# EAGLE board LTC_Balancer6 (EAGLE 5.06)
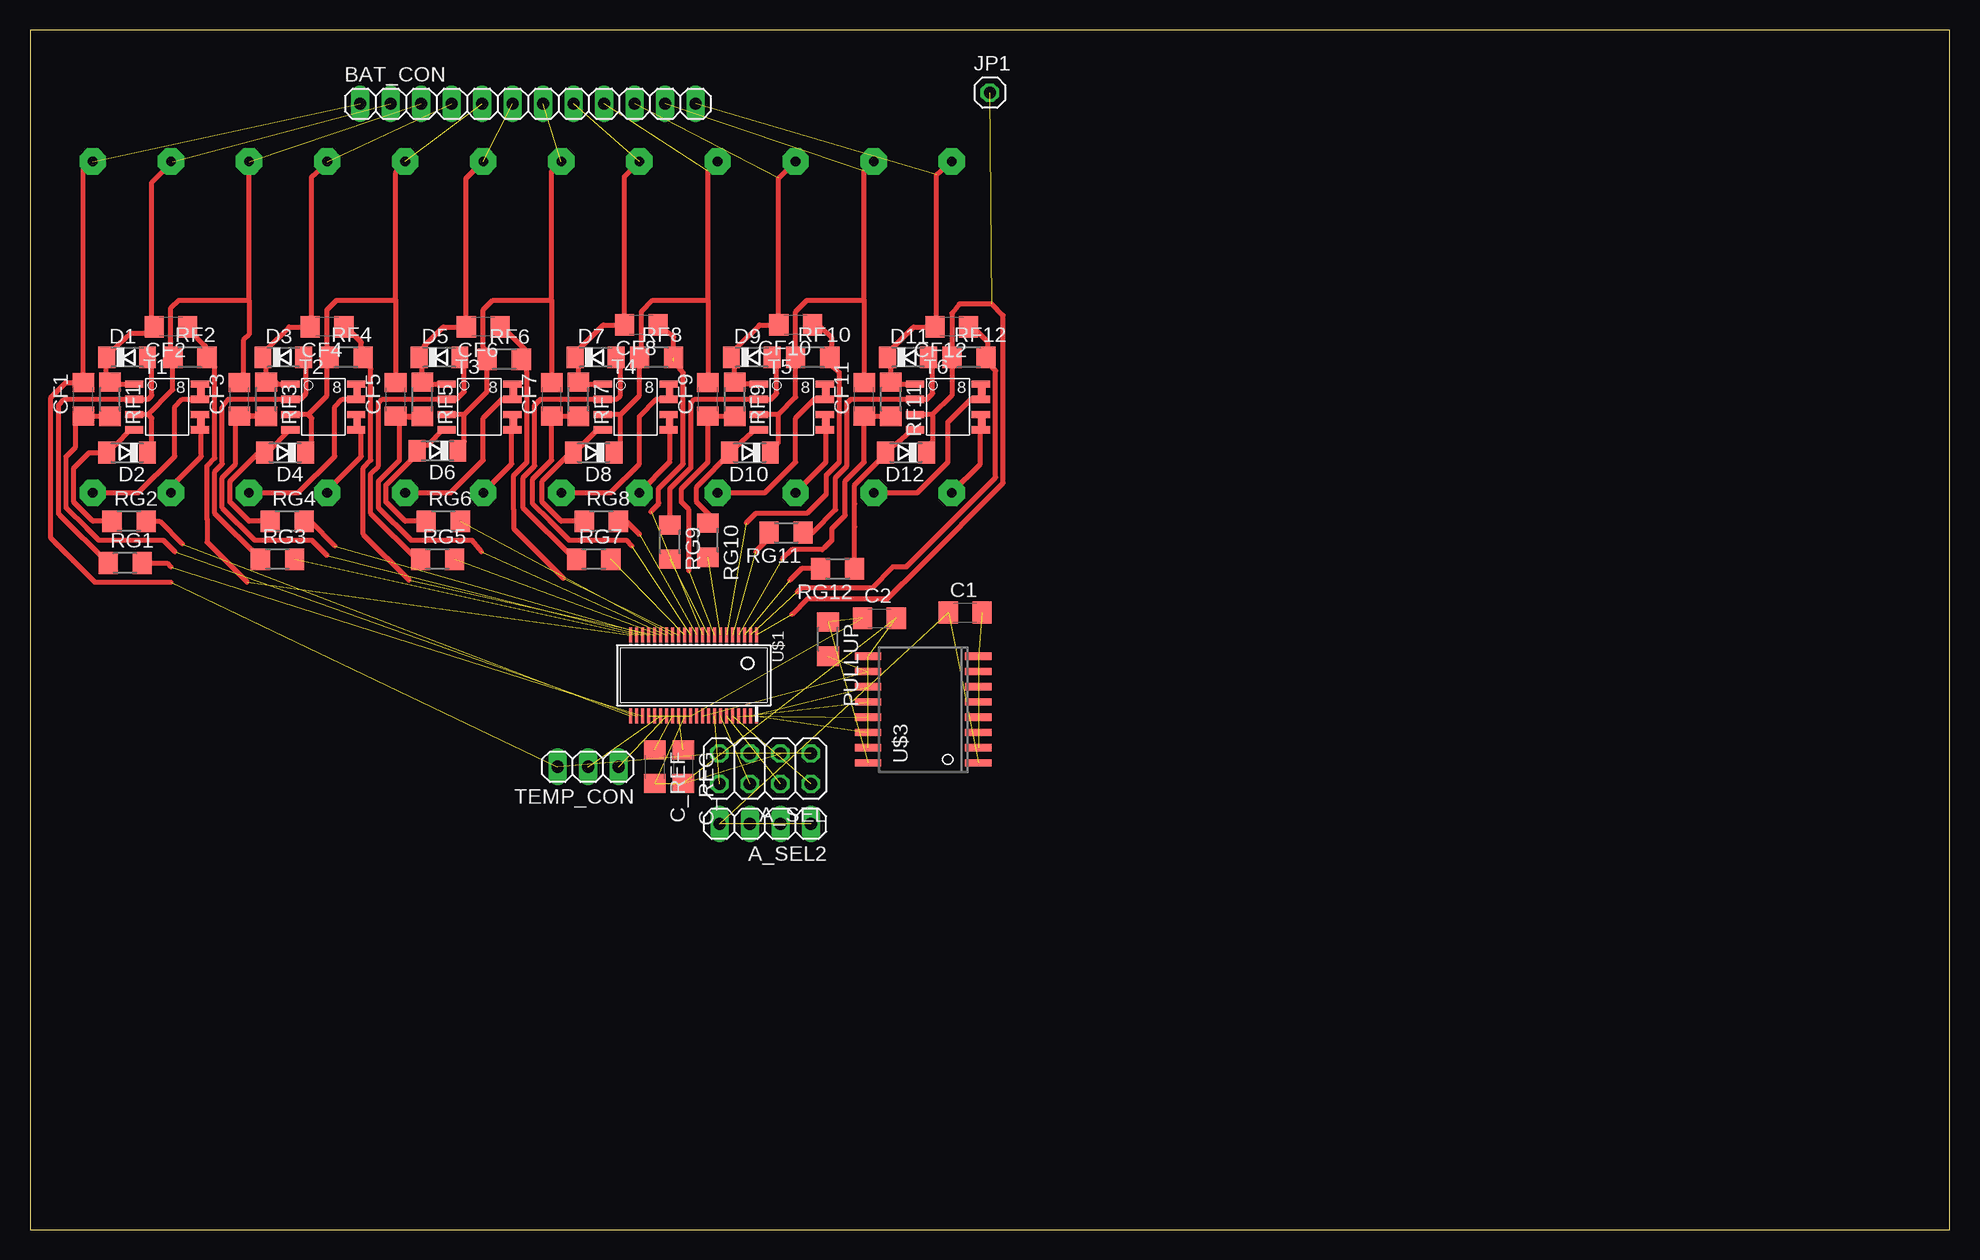
[diagram p0: board, top side]
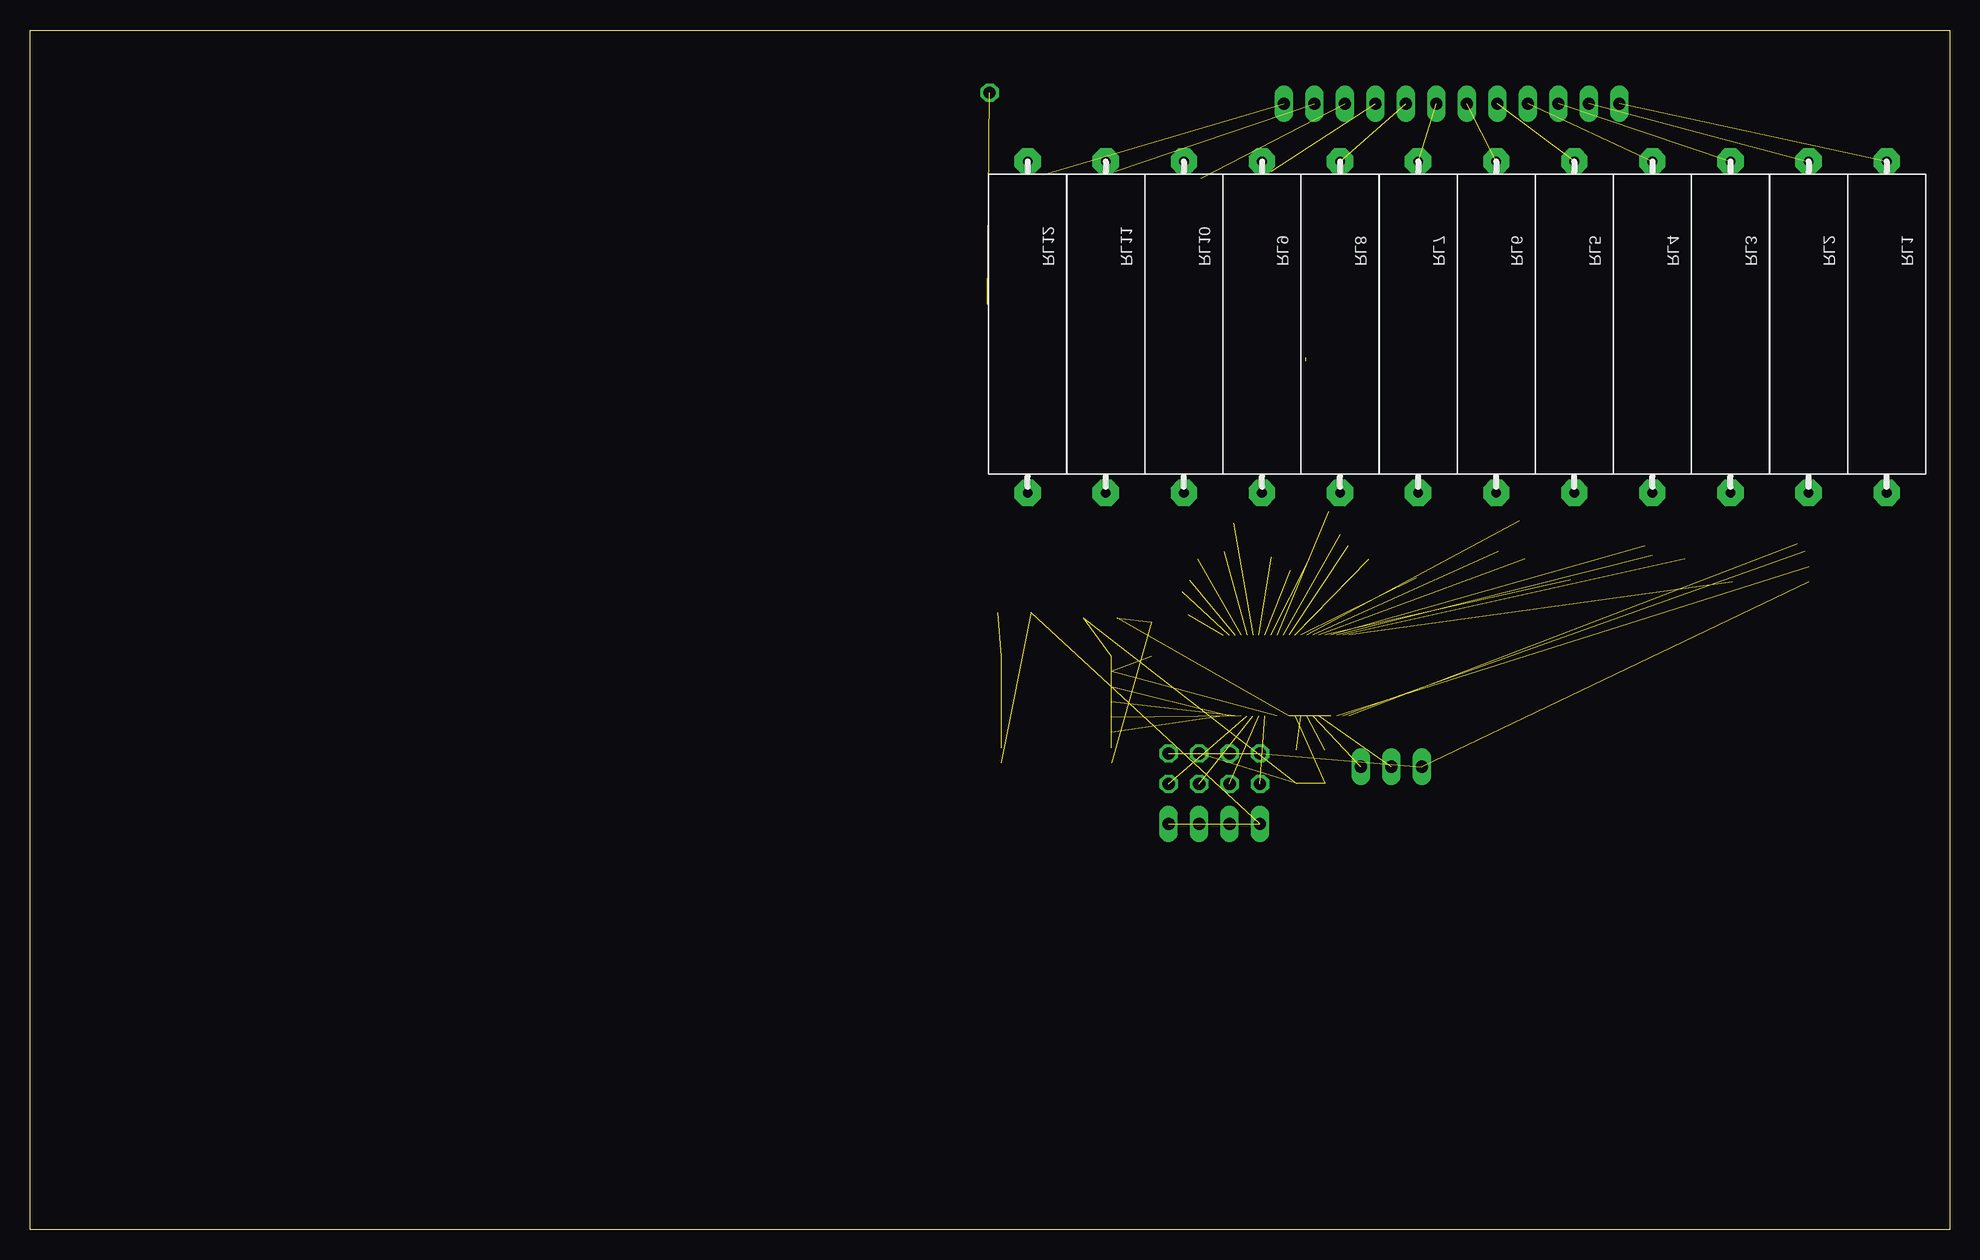
[diagram p1: board, bottom side, seen from below]

Size 160 x 100 mm. Coordinates in mm from the lower left corner, seen from the top.
Outline: 0,0 160,0 160,100 0,100 0,0
Copper layers (1*16): Top 0.035mm / dielectric 1.5mm / Bottom 0.035mm
Design rules "default": minimum track width 10mil, minimum drill 24mil, track to track 8mil, track to pad 8mil, pad to pad 8mil, via to via 8mil, smd to smd 8mil, copper to edge 40mil, drill to drill 8mil, minimum pad ring 10mil, minimum via ring 8mil, stop-mask expansion 4mil, vias tented up to drill 0mil, thermal gap 10mil

## Footprints (pad centres in the part's own frame; a part is rotated, then mirrored left to right if it is on the bottom)
2X04 = drill 1.016 octagon: 1 -3.81,-1.27; 2 -3.81,1.27; 3 -1.27,-1.27; 4 -1.27,1.27; 5 1.27,-1.27; 6 1.27,1.27; 7 3.81,-1.27; 8 3.81,1.27
1X04 = drill 1.016 long: 1 -3.81,0; 2 -1.27,0; 3 1.27,0; 4 3.81,0
1X12 = drill 1.016 long: 1 -13.97,0; 2 -11.43,0; 3 -8.89,0; 4 -6.35,0; 5 -3.81,0; 6 -1.27,0; 7 1.27,0; 8 3.81,0; 9 6.35,0; 10 8.89,0; 11 11.43,0; 12 13.97,0
C1206 = smd 1.6 x 1.8: 1 -1.4,0; 2 1.4,0
SOD80C = smd 1.4 x 1.8: A 1.7,0; C -1.7,0
1X01 = drill 1.016 octagon: 1 0,0
R1206 = smd 1.6 x 1.803: 1 -1.422,0; 2 1.422,0
R_5W = drill 0.813 pad 2.184 octagon: 1 0.46,0; 2 28.08,0
SO8 = smd 1.524 x 0.61: 1 1.067,4.445; 2 1.067,3.175; 3 1.067,1.905; 4 1.067,0.635; 5 6.553,0.635; 6 6.553,1.905; 7 6.553,3.175; 8 6.553,4.445 | smd 0.61 x 1.524: 9 6.635,3.703; 10 6.635,1.203
1X03 = drill 1.016 long: 1 -2.54,0; 2 0,0; 3 2.54,0
SSOP44DL = smd 0.25 x 1.25: 1 1.1,0.435; 2 1.6,0.435; 3 2.1,0.435; 4 2.6,0.435; 5 3.1,0.435; 6 3.6,0.435; 7 4.1,0.435; 8 4.6,0.435; 9 5.1,0.435; 10 5.6,0.435; 11 6.1,0.435; 12 6.6,0.435; 13 7.1,0.435; 14 7.6,0.435; 15 8.1,0.435; 16 8.6,0.435; 17 9.1,0.435; 18 9.6,0.435; 19 10.1,0.435; 20 10.6,0.435; 21 11.1,0.435; 22 11.6,0.435; 23 11.6,7.185; 24 11.1,7.185; 25 10.6,7.185; 26 10.1,7.185; 27 9.6,7.185; 28 9.1,7.185; 29 8.6,7.185; 30 8.1,7.185; 31 7.6,7.185; 32 7.1,7.185; 33 6.6,7.185; 34 6.1,7.185; 35 5.6,7.185; 36 5.1,7.185; 37 4.6,7.185; 38 4.1,7.185; 39 3.6,7.185; 40 3.1,7.185; 41 2.6,7.185; 42 2.1,7.185; 43 1.6,7.185; 44 1.1,7.185
SO16 = smd 0.6 x 2.2: 1 1.905,1.75; 2 3.175,1.75; 3 4.445,1.75; 4 5.715,1.75; 5 6.985,1.75; 6 8.255,1.75; 7 9.525,1.75; 8 10.795,1.75; 9 10.795,10.95; 10 9.525,10.95; 11 8.255,10.95; 12 6.985,10.95; 13 5.715,10.95; 14 4.445,10.95; 15 3.175,10.95; 16 1.905,10.95

## Placement (x,y rotation side)
A_SEL  [2X04]  61.28,38.42 180 top
A_SEL2  [1X04]  61.28,33.81 180 top
BAT_CON  [1X12]  41.5,93.85 0 top
C1  100n  [C1206]  77.95,51.44 0 top
C2  100n  [C1206]  70.8,50.96 0 top
C_REF  1u  [C1206]  52.07,38.58 270 top
C_REG  1u  [C1206]  54.45,38.58 270 top
CF1  100n  [C1206]  4.45,69.22 90 top
CF2  100n  [C1206]  11.75,75.25 180 top
CF3  100n  [C1206]  17.46,69.22 90 top
CF4  100n  [C1206]  24.77,75.25 180 top
CF5  100n  [C1206]  30.48,69.22 90 top
CF6  100n  [C1206]  37.78,75.25 180 top
CF7  100n  [C1206]  43.5,69.22 90 top
CF8  100n  [C1206]  50.96,75.41 180 top
CF9  100n  [C1206]  56.51,69.22 90 top
CF10  100n  [C1206]  63.82,75.41 180 top
CF11  100n  [C1206]  69.53,69.22 90 top
CF12  100n  [C1206]  76.83,75.25 180 top
D1  [SOD80C]  8.1,72.71 0 top
D2  [SOD80C]  8.1,64.77 180 top
D3  [SOD80C]  21.11,72.71 0 top
D4  [SOD80C]  21.27,64.77 180 top
D5  [SOD80C]  34.13,72.71 0 top
D6  [SOD80C]  33.97,64.93 180 top
D7  [SOD80C]  47.15,72.71 0 top
D8  [SOD80C]  46.99,64.77 180 top
D9  [SOD80C]  60.17,72.71 0 top
D10  [SOD80C]  60.01,64.77 180 top
D11  [SOD80C]  73.18,72.71 0 top
D12  [SOD80C]  73.02,64.77 180 top
JP1  [1X01]  80.01,94.77 0 top
PULLUP  10k  [R1206]  66.52,49.21 270 top
RF1  100  [R1206]  6.67,69.22 270 top
RF2  100  [R1206]  13.33,72.71 0 top
RF3  100  [R1206]  19.68,69.22 270 top
RF4  100  [R1206]  26.35,72.71 0 top
RF5  100  [R1206]  32.7,69.22 270 top
RF6  100  [R1206]  39.53,72.55 0 top
RF7  100  [R1206]  45.72,69.22 270 top
RF8  100  [R1206]  52.23,72.71 0 top
RF9  100  [R1206]  58.74,69.22 270 top
RF10  100  [R1206]  65.25,72.71 0 top
RF11  100  [R1206]  71.75,69.22 270 top
RF12  100  [R1206]  78.26,72.71 0 top
RG1  3k3  [R1206]  7.94,55.56 0 top
RG2  3k3  [R1206]  8.26,59.05 0 top
RG3  3k3  [R1206]  20.64,55.88 0 top
RG4  3k3  [R1206]  21.43,59.05 0 top
RG5  3k3  [R1206]  33.97,55.88 0 top
RG6  3k3  [R1206]  34.45,59.05 0 top
RG7  3k3  [R1206]  46.99,55.88 0 top
RG8  3k3  [R1206]  47.62,59.05 0 top
RG9  3k3  [R1206]  53.34,57.31 270 top
RG10  3k3  [R1206]  56.51,57.47 270 top
RG11  3k3  [R1206]  63.02,58.1 180 top
RG12  3k3  [R1206]  67.31,55.09 180 top
RL1  R_5W  [R_5W]  5.24,60.96 90 top
RL2  R_5W  [R_5W]  11.75,60.96 90 top
RL3  R_5W  [R_5W]  18.26,60.96 90 top
RL4  R_5W  [R_5W]  24.77,60.96 90 top
RL5  R_5W  [R_5W]  31.27,60.96 90 top
RL6  R_5W  [R_5W]  37.78,60.96 90 top
RL7  R_5W  [R_5W]  44.29,60.96 90 top
RL8  R_5W  [R_5W]  50.8,60.96 90 top
RL9  R_5W  [R_5W]  57.31,60.96 90 top
RL10  R_5W  [R_5W]  63.82,60.96 90 top
RL11  R_5W  [R_5W]  70.33,60.96 90 top
RL12  R_5W  [R_5W]  76.83,60.96 90 top
T1  IRF_7104  [SO8]  7.62,66.04 0 top
T2  IRF_7104  [SO8]  20.64,66.04 0 top
T3  IRF_7104  [SO8]  33.66,66.04 0 top
T4  IRF_7104  [SO8]  46.67,66.04 0 top
T5  IRF_7104  [SO8]  59.69,66.04 0 top
T6  IRF_7104  [SO8]  72.71,66.04 0 top
TEMP_CON  [1X03]  46.51,38.58 180 top
U$1  LTC6802-2  [SSOP44DL]  61.67,50.02 180 top
U$3  ADUM1401  [SO16]  80.8,36.99 90 top

## Library data of the parts
A_SEL A_SEL2 BAT_CON JP1 TEMP_CON = pinhead
C1 C2 C_REF C_REG CF1-CF12 PULLUP RF1-RF12 RG1-RG12 = rcl
D1-D12 = diode
RL1-RL12 = R_Power
T1-T6 = IRF_7104
U$1 = LTC6802
U$3 = ADuM1401

## Nets
+5V: C2.1 C_REG.1 PULLUP.1 U$1.31 U$1.33 U$3.16
A0: A_SEL.8 U$1.37
A1: A_SEL.6 U$1.38
A2: A_SEL.4 U$1.39
A3: A_SEL.2 U$1.40
ASD: RL5.1 T3.7
BK2: BAT_CON.2 CF2.2 D1.C RF1.1 RL2.2 T1.1
BK3: BAT_CON.3 CF3.2 D2.C RF2.1 RL3.2 T1.3
BK4: BAT_CON.4 CF4.2 D3.C RF3.1 RL4.2 T2.1
BK5: BAT_CON.5 CF5.2 D4.C RF4.1 RL5.2 T2.3
BK6: BAT_CON.6 CF6.2 D5.C RF5.1 RL6.2 T3.1
BK7: BAT_CON.7 CF7.2 D6.C RF6.1 RL7.2 T3.3
BK8: BAT_CON.8 CF8.2 D7.C RF7.1 RL8.2 T4.1
BK9: BAT_CON.9 CF9.2 D8.C RF8.1 RL9.2 T4.3
BK10: BAT_CON.10 CF10.2 D9.C RF9.1 RL10.2 T5.1
BK11: BAT_CON.11 CF11.2 D10.C RF10.1 RL11.2 T5.3
BK12: BAT_CON.12 CF12.2 D11.C RF11.1 RL12.2 T6.1
C1: CF1.1 RF1.2 U$1.24
C2: CF2.1 RF2.2 U$1.22
C3: CF3.1 RF3.2 U$1.20
C4: CF4.1 RF4.2 U$1.18
C5: CF5.1 RF5.2 U$1.16
C6: CF6.1 RF6.2 U$1.14
C7: CF7.1 RF7.2 U$1.12
C8: CF8.1 RF8.2 U$1.10
C9: CF9.1 RF9.2 U$1.8
C10: CF10.1 RF10.2 U$1.6
C11: CF11.1 RF11.2 U$1.4
C12: CF12.1 RF12.2 U$1.2
CS: U$3.3
CSBI: U$1.44 U$3.14
GND: C1.2 U$3.2 U$3.8
GPIO1: PULLUP.2 U$1.35 U$3.10
ISO_EN: U$3.7
MISO: U$3.6
MOSI: U$3.5
N$2: TEMP_CON.1 U$1.29
N$3: C_REF.1 U$1.30
N$4: TEMP_CON.2 U$1.28
N$5: RL3.1 T2.7
N$6: RL4.1 T2.5
N$8: RL1.1 T1.7
N$9: RL2.1 T1.5
N$10: RL6.1 T3.5
N$11: RL7.1 T4.7
N$12: RL8.1 T4.5
N$13: RL9.1 T5.7
N$14: RL10.1 T5.5
N$15: RL11.1 T6.7
N$16: RL12.1 T6.5
N$17: D1.A RG1.1 T1.2
N$23: D2.A RG2.1 T1.4
N$55: D3.A RG3.1 T2.2
N$56: D4.A RG4.1 T2.4
N$57: D5.A RG5.1 T3.2
N$58: D7.A RG7.1 T4.2
N$59: D6.A RG6.1 T3.4
N$60: D8.A RG8.1 T4.4
N$61: D9.A RG9.1 T5.2
N$62: D10.A RG10.1 T5.4
N$63: D11.A RG11.1 T6.2
N$64: D12.A RG12.1 T6.4
S1: RG1.2 U$1.25
S2: RG2.2 U$1.23
S3: RG3.2 U$1.21
S4: RG4.2 U$1.19
S5: RG5.2 U$1.17
S6: RG6.2 U$1.15
S7: RG7.2 U$1.13
S8: RG8.2 U$1.11
S9: RG9.2 U$1.9
S10: RG10.2 U$1.7
S11: RG11.2 U$1.5
S12: RG12.2 U$1.3
SCK: U$3.4
SCKI: U$1.41 U$3.13
SDI: U$1.42 U$3.12
SDO: U$1.43 U$3.11
V+: D12.C JP1.1 RF12.1 T6.3 U$1.1
V-: A_SEL.1 A_SEL.3 A_SEL.5 A_SEL.7 BAT_CON.1 C2.2 C_REF.2 C_REG.2 CF1.2 RL1.2 TEMP_CON.3 U$1.26 U$1.27 U$1.32 U$3.9 U$3.15
VCC: A_SEL2.1 A_SEL2.2 A_SEL2.3 A_SEL2.4 C1.1 U$3.1

## Tracks (layer width: path | path; a pad name or v marks a point on that pad's centre or on a via)
+5V  (5 unrouted)
A0  (1 unrouted)
A1  (1 unrouted)
A2  (1 unrouted)
A3  (1 unrouted)
ASD
  Top 0.406: RL5.1 35.07,61.42 37.78,64.14 37.78,67.63 39.37,69.22 T3.7
BK2  (1 unrouted)
  Top 0.406: RL2.2 11.89,89.04 10.16,87.31 10.16,74.74 | T1.1 6.5,70.48 RF1.1 6.52,70.64 6.35,70.8 6.35,72.59 D1.C 6.24,72.72 7.94,74.3 8.38,74.74 10.16,74.74 | 10.16,74.74 CF2.2
BK3  (1 unrouted)
  Top 0.406: 9.84,67.94 11.91,70.02 RF2.1 11.6,73.19 11.75,73.34 11.75,76.83 12.38,77.47 18.26,77.47 | 9.84,67.94 T1.3 | 9.84,67.94 10.16,67.63 10.16,65.29 D2.C | 18.26,77.47 18.26,74.61 17.78,74.14 17.78,70.96 17.46,70.64 CF3.2 | 18.26,77.47 RL3.2
BK4  (1 unrouted)
  Top 0.406: RL4.2 24.77,88.9 23.5,87.79 23.5,75.44 CF4.2 21.59,75.25 19.68,73.34 19.68,72.82 D3.C 19.57,72.19 19.68,71.75 RF3.1 20.48,70.64 20.64,70.48 T2.1
BK5  (1 unrouted)
  Top 0.406: 23.18,67.94 T2.3 | 23.18,67.94 23.5,67.63 23.5,64.97 D4.C | 23.18,67.94 24.77,69.53 24.77,72.54 RF4.1 24.93,73.19 24.77,73.34 | 24.77,73.34 25.08,73.03 | 24.77,73.34 24.77,76.68 25.56,77.47 30.48,77.47 | RL5.2 31.27,89.06 30.48,88.11 30.48,77.47 | 30.48,77.47 30.48,73.66 CF5.2
BK6  (1 unrouted)
  Top 0.406: RL6.2 37.78,89.06 36.35,87.63 36.35,75.54 CF6.2 34.45,75.25 32.86,73.66 32.86,72.98 D5.C 32.75,72.34 32.7,71.91 RF5.1 33.33,70.48 33.97,70.48 T3.1
BK7  (1 unrouted)
  Top 0.406: D6.C 35.99,65.52 36.2,65.72 36.2,67.94 | 36.2,67.94 T3.3 | 36.2,67.94 38.11,69.86 RF6.1 38.27,73.19 37.78,73.5 37.78,76.68 38.58,77.47 43.5,77.47 | RL7.2 44.13,88.9 43.5,88.27 43.5,77.47 | 43.5,77.47 CF7.2
BK8  (1 unrouted)
  Top 0.406: T4.1 47.31,70.48 46.36,70.48 RF7.1 45.72,72.23 45.61,72.19 D7.C 45.88,72.98 45.88,73.5 47.78,75.41 CF8.2 49.56,87.8 RL8.2
BK9  (1 unrouted)
  Top 0.406: 49.21,67.94 50.81,69.54 RF8.1 50.81,73.19 50.96,73.34 50.96,76.52 51.91,77.47 56.52,77.47 | 49.21,67.94 T4.3 | 49.21,67.94 49.21,65.45 D8.C | 56.52,77.47 56.52,70.77 CF9.2 | 56.52,77.47 56.52,88.25 RL9.2
BK10  (1 unrouted)
  Top 0.406: RL10.2 63.8,89.04 62.39,87.63 62.39,75.38 CF10.2 60.8,75.41 58.9,73.5 58.58,73.3 D9.C 58.94,72.82 58.74,72.23 RF9.1 59.38,70.48 60.64,70.48 T5.1
BK11  (1 unrouted)
  Top 0.406: 62.39,67.94 63.82,69.38 RF10.1 63.67,72.87 63.82,73.03 63.82,76.52 64.77,77.47 69.53,77.47 | 62.39,67.94 T5.3 | D10.C 61.87,65.36 62.39,65.56 62.39,67.94 | 69.53,77.47 CF11.2 | 69.53,77.47 69.53,88.25 RL11.2
BK12  (1 unrouted)
  Top 0.406: T6.1 72.22,70.48 RF11.1 71.75,72.12 D11.C 71.64,73.23 73.66,75.25 CF12.2 75.56,75.22 75.56,87.95 76.82,89.04 RL12.2
C1  (1 unrouted)
  Top 0.406: RF1.2 6.33,67.81 CF1.1 3.81,67.63 3.81,65.25 3.02,64.45 3.02,60.17 4.76,58.42 5.71,57.47 11.11,57.47 12.06,56.52
C2  (1 unrouted)
  Top 0.406: RF2.2 14.29,72.22 | RF2.2 14.61,72.71 15.4,71.91 15.4,64.29 14.76,63.66 14.76,59.21 14.76,57.31 18.1,53.98 | CF2.1 13.34,74.93 14.61,73.66 14.61,72.87 RF2.2
C3  (1 unrouted)
  Top 0.406: CF3.1 19.98,67.81 RF3.2 17.63,67.79 17.14,67.31 17.14,63.82 16.03,62.71 16.03,60.17 18.73,57.47 23.5,57.47 24.77,56.2
C4  (1 unrouted)
  Top 0.406: CF4.1 26.48,75.12 27.62,73.98 27.62,72.86 RF4.2 27.77,72.56 28.42,71.75 28.42,64.14 27.78,63.5 27.78,57.94 31.59,54.13
C5  (1 unrouted)
  Top 0.406: CF5.1 33.32,67.5 RF5.2 30.96,67.79 30.8,67.63 30.8,64.14 29.05,62.39 29.05,60.17 31.75,57.47 | 31.75,57.47 | 31.75,57.47 36.83,57.47 37.62,56.52
C6  (1 unrouted)
  Top 0.406: CF6.1 39.82,74.8 41.27,73.34 41.27,72.87 RF6.2 41.11,72.56 41.43,71.44 41.43,63.98 40.32,62.87 40.32,60.01 40.32,58.42 44.45,54.29
C7  (1 unrouted)
  Top 0.406: RF7.2 44.47,67.79 CF7.1 43.5,64.14 41.91,62.55 41.91,60.48 43.34,59.05 44.93,57.47 49.69,57.47 50.16,56.99
C8  (2 unrouted)
  Top 0.406: RF8.2 53.65,74.43 CF8.1 52.04,75.91 52.07,75.88 | 53.66,73.18 53.66,72.39 54.45,71.44 54.45,63.82 52.39,61.75 52.39,60.64 52.39,60.48 51.75,59.85
C9  (1 unrouted)
  Top 0.406: RF9.2 57.81,67.79 CF9.1 56.52,63.98 54.29,61.75 54.29,60.64 54.93,60.01 54.93,54.93
C10  (1 unrouted)
  Top 0.406: CF10.1 65.85,75.28 66.83,74.3 66.83,73.02 RF10.2 66.67,72.08 67.47,71.44 67.47,63.98 66.36,62.87 | 66.36,62.87 | 66.36,62.87 66.36,61.28 64.77,59.69 60.48,59.69 59.69,58.9
C11  (1 unrouted)
  Top 0.406: RF11.2 72.37,67.81 CF11.1 69.53,63.98 67.94,62.39 67.94,59.53 66.83,58.42 66.83,57.47 66.2,56.83 | 66.2,56.83 | 66.2,56.83 66.04,56.67 63.5,56.67 62.71,55.88
C12  (1 unrouted)
  Top 0.406: CF12.1 78.71,75.12 79.85,73.98 79.85,73.02 RF12.2 80.16,71.92 80.49,71.6 80.49,62.71 73.03,55.24 71.91,55.24 70.17,53.5 64.29,53.5 63.98,53.18
CSBI  (1 unrouted)
GND  (2 unrouted)
GPIO1  (2 unrouted)
N$2  (1 unrouted)
N$3  (1 unrouted)
N$4  (1 unrouted)
N$5
  Top 0.406: T2.7 26.04,69.22 25.4,68.58 25.4,64.45 22.37,61.42 RL3.1
N$6
  Top 0.406: RL4.1 25.08,61.91 27.62,64.45 27.62,66.56 T2.5
N$8
  Top 0.406: RL1.1 9.03,61.42 12.06,64.45 12.06,68.58 12.7,69.22 T1.7
N$9
  Top 0.406: RL2.1 11.75,61.91 14.29,64.45 14.29,66.56 T1.5
N$10
  Top 0.406: RL6.1 37.78,61.44 40.16,63.82 40.16,66.56 T3.5
N$11
  Top 0.406: RL7.1 48.4,61.42 50.8,63.82 50.8,67.79 52.23,69.22 T4.7
N$12
  Top 0.406: RL8.1 53.32,63.96 53.34,64.29 53.34,66.47 T4.5
N$13
  Top 0.406: RL9.1 61.26,61.42 63.82,63.98 63.82,67.63 65.41,69.22 T5.7
N$14
  Top 0.406: RL10.1 66.34,63.96 66.36,66.83 66.36,66.79 T5.5
N$15
  Top 0.406: RL11.1 73.96,61.42 76.52,63.98 76.52,67.31 78.42,69.22 T6.7
N$16
  Top 0.406: RL12.1 79.22,63.82 79.22,66.63 T6.5
N$17
  Top 0.406: RG1.1 2.54,59.53 2.38,59.68 2.38,68.74 2.86,69.22 T1.2 9.84,69.22 10.16,69.53 10.16,71.91 9.8,72.59 D1.A
N$23
  Top 0.406: T1.4 8.41,66.67 7.14,65.41 6.87,65.41 D2.A 4.92,64.77 3.65,63.5 3.65,60.64 5.24,59.05 RG2.1
N$55
  Top 0.406: D3.A 22.86,72.59 22.7,72.23 23.02,72.07 23.02,69.69 22.54,69.22 T2.2 16.51,69.22 16.03,68.58 16.03,63.82 15.4,63.18 15.4,59.69 RG3.1
N$56
  Top 0.406: T2.4 19.8,64.77 D4.A 19.05,64.77 16.67,62.39 16.67,60.64 18.26,59.05 RG4.1
N$57
  Top 0.406: D5.A 35.83,72.75 36.2,71.91 36.2,69.85 35.56,69.22 T3.2 29.37,69.22 29.05,68.9 29.05,63.66 28.42,63.02 28.42,59.69 32.38,55.72 RG5.1
N$58
  Top 0.406: D7.A 49.17,72.44 49.21,72.07 49.21,69.53 48.9,69.22 T4.2 42.55,69.22 42.07,68.74 42.07,63.66 41.12,62.71 41.12,60.17 45.25,56.03 RG7.1
N$59
  Top 0.406: 35.24,66.67 T3.4 34.45,66.67 33.18,65.41 32.82,65.41 D6.A 32.38,64.77 29.69,62.07 29.69,60.64 31.27,59.05 RG6.1
N$60
  Top 0.406: T4.4 47.31,66.67 45.72,65.09 45.61,65.09 D8.A 45.24,64.93 42.7,62.39 42.7,60.64 44.29,59.05 RG8.1
N$61
  Top 0.406: D9.A 62.34,72.44 62.23,71.91 62.23,69.69 61.75,69.22 T5.2 55.4,69.22 55.09,68.9 55.09,63.5 53.34,61.75 53.34,58.89 RG9.1
N$62
  Top 0.406: T5.4 60.21,66.52 D10.A 58.58,64.93 55.56,61.91 55.56,60.64 56.67,59.53 RG10.1
N$63
  Top 0.406: D11.A 75.04,72.75 75.25,71.91 75.25,69.69 74.77,69.22 T6.2 68.42,69.22 68.1,68.9 68.1,63.66 67.15,62.71 67.15,60.01 65.25,58.1 RG11.1
N$64
  Top 0.406: T6.4 73.55,66.67 D12.A 71.28,64.61 68.74,62.07 68.74,60.48 68.74,58.58 RG12.1
S1  (1 unrouted)
  Top 0.406: RG1.2 11.43,55.56 11.75,55.24
S2  (1 unrouted)
  Top 0.406: RG2.2 10.79,59.05 12.7,57.15
S3  (1 unrouted)
S4  (1 unrouted)
  Top 0.406: RG4.2 23.34,59.05 25.4,56.99
S5  (1 unrouted)
S6  (1 unrouted)
S7  (1 unrouted)
S8  (1 unrouted)
  Top 0.406: RG8.2 49.69,59.05 50.8,57.94
S9  (1 unrouted)
S10  (1 unrouted)
S11  (1 unrouted)
  Top 0.406: RG11.2 61.6,57.63 60.48,56.52
S12  (1 unrouted)
  Top 0.406: RG12.2 64.29,55.09 63.34,54.13
SCKI  (1 unrouted)
SDI  (1 unrouted)
SDO  (1 unrouted)
V+  (2 unrouted)
  Top 0.406: 75.25,67.94 76.84,69.54 RF12.1 76.84,76.36 77.47,77.15 80.17,77.15 81.12,76.2 81.12,62.23 74.14,55.24 71.44,52.55 64.77,52.55 63.5,51.28 | 75.25,67.94 T6.3 | 75.25,67.94 75.25,65.77 D12.C
V-  (14 unrouted)
  Top 0.406: RL1.2 4.45,88.41 CF1.2 2.99,70.61 1.75,69.37 1.75,57.63 5.4,53.98 11.75,53.98
VCC  (5 unrouted)